# Altium PCB LCD.PcbDoc
Units mm, origin at the board's own origin, x right, y up, seen from the top; angles counter-clockwise.
Board outline 90 x 60 mm, 2 copper layers (Top Layer, Bottom Layer); 2 components, 0 nets, 104 pads, 0 vias.
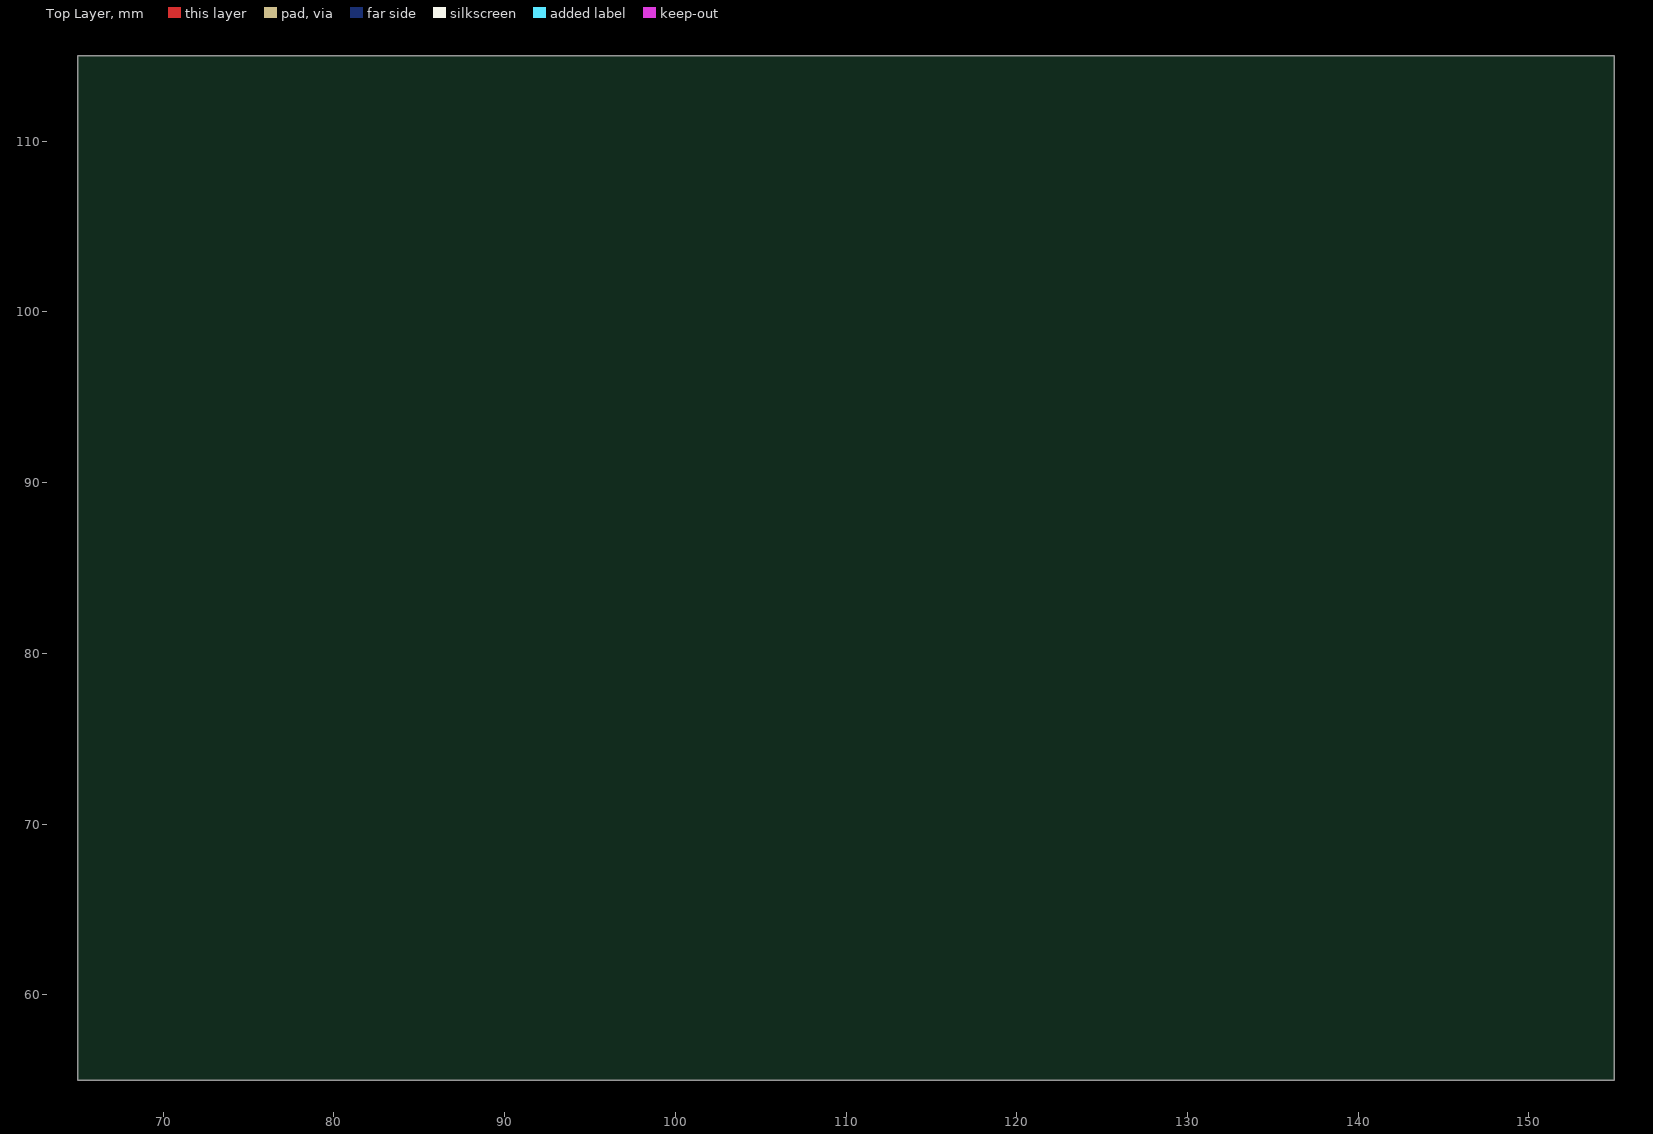
[diagram p0: Top Layer view]
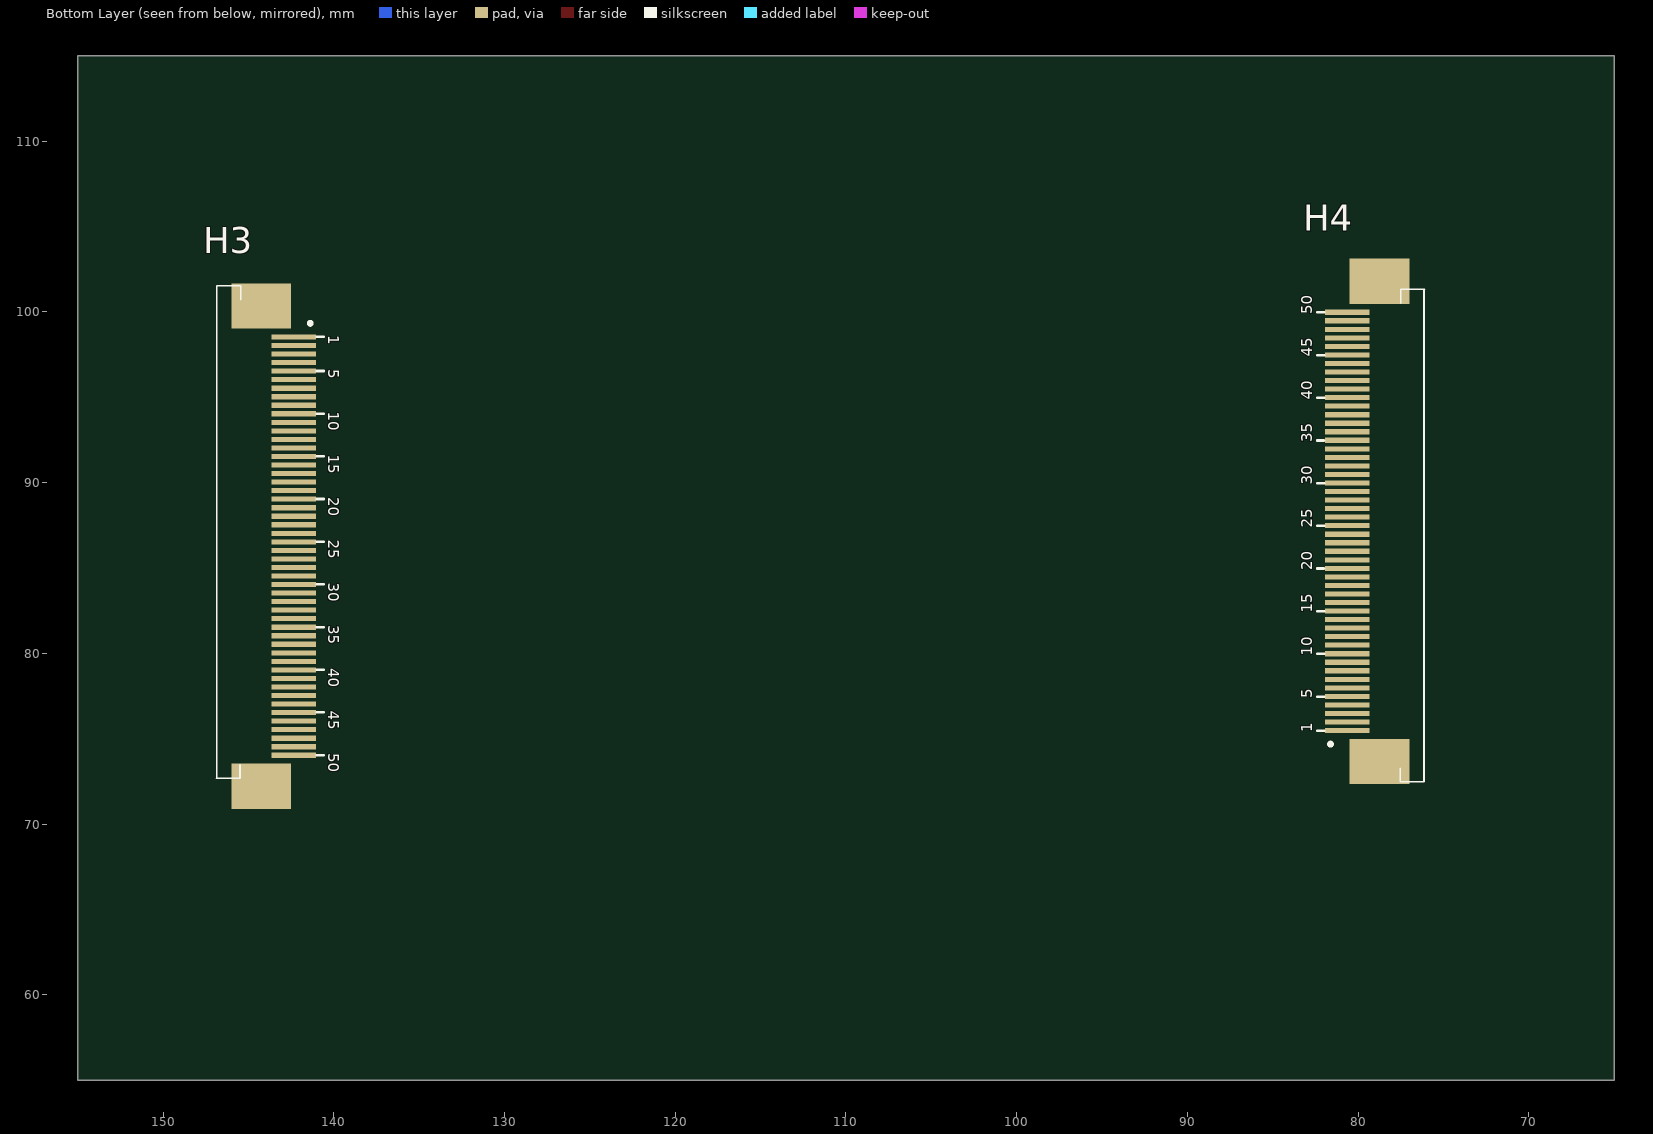
[diagram p1: Bottom Layer view, seen from below]

## Layer stack, top to bottom
Top Solder: solder mask 0.0102, Solder Resist, Dk 3.5
Top Layer: signal copper 0.0356
Dielectric 1: dielectric 0.32, FR-4, Dk 4.8
Bottom Layer: signal copper 0.0356
Bottom Solder: solder mask 0.0102, Solder Resist, Dk 3.5

## Board outline
65,55 65,115 155,115 155,55

## Design rules (kind name [scope] priority, off if disabled: settings)
Clearance [All] p1: gap=0.254 ignorepadtopadclearanceinfootprint=FALSE
PolygonConnect [All] p1: connectstyle=Relief reliefconductorwidth=0.254 reliefentries=4 polygonreliefangle="90 Angle" airgapwidth=0.254
RoutingVias [All] p1: holewidth=0.711 width=1.27 viastyle="Through Hole" minholewidth=0.711 minwidth=1.27 maxholewidth=0.711 maxwidth=1.27
SolderMaskExpansion [All] p1: expansion=0.102 istentingtop=FALSE
Width [All] p1: maxlimit=0.254 minlimit=0.254 preferedwidth=0.254
30 further rules are at their usual default settings.

## Components (designator, comment, footprint, x,y, rotation, side; value= is the part's Value field where it differs from the comment)
H3 "FFC_50_DBG" FFC_50_DBG 144.605,90.026 r270 bottom
H4 "FFC_50_DBG" FFC_50_DBG 78.394,83.974 r90 bottom (schematic designator H3)

## Footprints (in the part's own frame and the unit in brackets; to place one, negate y for a bottom-side part, rotate by r counter-clockwise, add the part's x,y. Pads: shape width x height; smd on the part's side, far side on the other; paste and mask are expansions set on the pad)
FFC_50_DBG [mm]
  rect 0.3x2.6 smd: 1(-8.5,2.25) 2(-8,2.25) 3(-7.5,2.25) 4(-7,2.25) 5(-6.5,2.25) 6(-6,2.25) 7(-5.5,2.25) 8(-5,2.25) 9(-4.5,2.25) 10(-4,2.25) 11(-3.5,2.25) 12(-3,2.25) 13(-2.5,2.25) 14(-2,2.25) 15(-1.5,2.25) 16(-1,2.25) 17(-0.5,2.25) 18(0,2.25) 19(0.5,2.25) 20(1,2.25) 21(1.5,2.25) 22(2,2.25) 23(2.5,2.25) 24(3,2.25) 25(3.5,2.25) 26(4,2.25) 27(4.5,2.25) 28(5,2.25) 29(5.5,2.25) 30(6,2.25) 31(6.5,2.25) 32(7,2.25) 33(7.5,2.25) 34(8,2.25) 35(8.5,2.25) 36(9,2.25) 37(9.5,2.25) 38(10,2.25) 39(10.5,2.25) 40(11,2.25) 41(11.5,2.25) 42(12,2.25) 43(12.5,2.25) 44(13,2.25) 45(13.5,2.25) 46(14,2.25) 47(14.5,2.25) 48(15,2.25) 49(15.5,2.25) 50(16,2.25)
  rect 2.65x3.5 smd: MP1(-10.312,0.356) MP1(17.812,0.356)
  silkscreen extent -11.5,-2.29 17.35,4.01, body extent -11.49,-2.32 19.01,3.32, height 2.06

## Nets (pads, with @x,y where several pads share a name; then routed paths per layer and width w, separated by ;. In a path a pad name is that pad's centre, name@x,y a point inside that pad or via, vN(x,y) a via of type N, cw(c..) or ccw(c..) an arc to the next point about the centre after c; other vN are vias at no path point)
pads on no net: H3.1 H3.2 H3.3 H3.4 H3.5 H3.6 H3.7 H3.8 H3.9 H3.10 H3.11 H3.12 H3.13 H3.14 H3.15 H3.16 H3.17 H3.18 H3.19 H3.20 H3.21 H3.22 H3.23 H3.24 H3.25 H3.26 H3.27 H3.28 H3.29 H3.30 H3.31 H3.32 H3.33 H3.34 H3.35 H3.36 H3.37 H3.38 H3.39 H3.40 H3.41 H3.42 H3.43 H3.44 H3.45 H3.46 H3.47 H3.48 H3.49 H3.50 H3.MP1 H4.1 H4.2 H4.3 H4.4 H4.5 H4.6 H4.7 H4.8 H4.9 H4.10 H4.11 H4.12 H4.13 H4.14 H4.15 H4.16 H4.17 H4.18 H4.19 H4.20 H4.21 H4.22 H4.23 H4.24 H4.25 H4.26 H4.27 H4.28 H4.29 H4.30 H4.31 H4.32 H4.33 H4.34 H4.35 H4.36 H4.37 H4.38 H4.39 H4.40 H4.41 H4.42 H4.43 H4.44 H4.45 H4.46 H4.47 H4.48 H4.49 H4.50 H4.MP1

## Silkscreen, mask and mechanical layers (free items; w line width, h text height)
Board:
  the board outline again, w0.254

## Text inside footprints (layer, text, board x,y; h text height)
H3: Bottom Overlay "50" at 140.313,74.137 h0.64 r90; Bottom Overlay "45" at 140.313,76.637 h0.64 r90; Bottom Overlay "40" at 140.313,79.137 h0.64 r90; Bottom Overlay "35" at 140.313,81.637 h0.64 r90; Bottom Overlay "30" at 140.313,84.137 h0.64 r90; Bottom Overlay "25" at 140.313,86.637 h0.64 r90; Bottom Overlay "20" at 140.313,89.137 h0.64 r90; Bottom Overlay "15" at 140.313,91.637 h0.64 r90; Bottom Overlay "10" at 140.313,94.137 h0.64 r90; Bottom Overlay "5" at 140.313,96.637 h0.64 r90; Bottom Overlay "1" at 140.313,98.637 h0.64 r90
H4: Bottom Overlay "50" at 82.687,99.863 h0.64 r270; Bottom Overlay "45" at 82.687,97.363 h0.64 r270; Bottom Overlay "40" at 82.687,94.863 h0.64 r270; Bottom Overlay "35" at 82.687,92.363 h0.64 r270; Bottom Overlay "30" at 82.687,89.863 h0.64 r270; Bottom Overlay "25" at 82.687,87.363 h0.64 r270; Bottom Overlay "20" at 82.687,84.863 h0.64 r270; Bottom Overlay "15" at 82.687,82.363 h0.64 r270; Bottom Overlay "10" at 82.687,79.863 h0.64 r270; Bottom Overlay "5" at 82.687,77.363 h0.64 r270; Bottom Overlay "1" at 82.687,75.363 h0.64 r270